# Altium PCB PCB2.PcbDoc (part 3 of 3)
Units mm, origin at the board's own origin, x right, y up, seen from the top; angles counter-clockwise.
Board outline 51.19 x 48.9 mm, 6 copper layers (Top Layer, Internal Plane 1, Signal Layer 3, Signal Layer 2, Internal Plane 2, Bottom Layer), stack 1.58 mm thick; 165 components, 90 nets, 480 pads, 1318 vias.
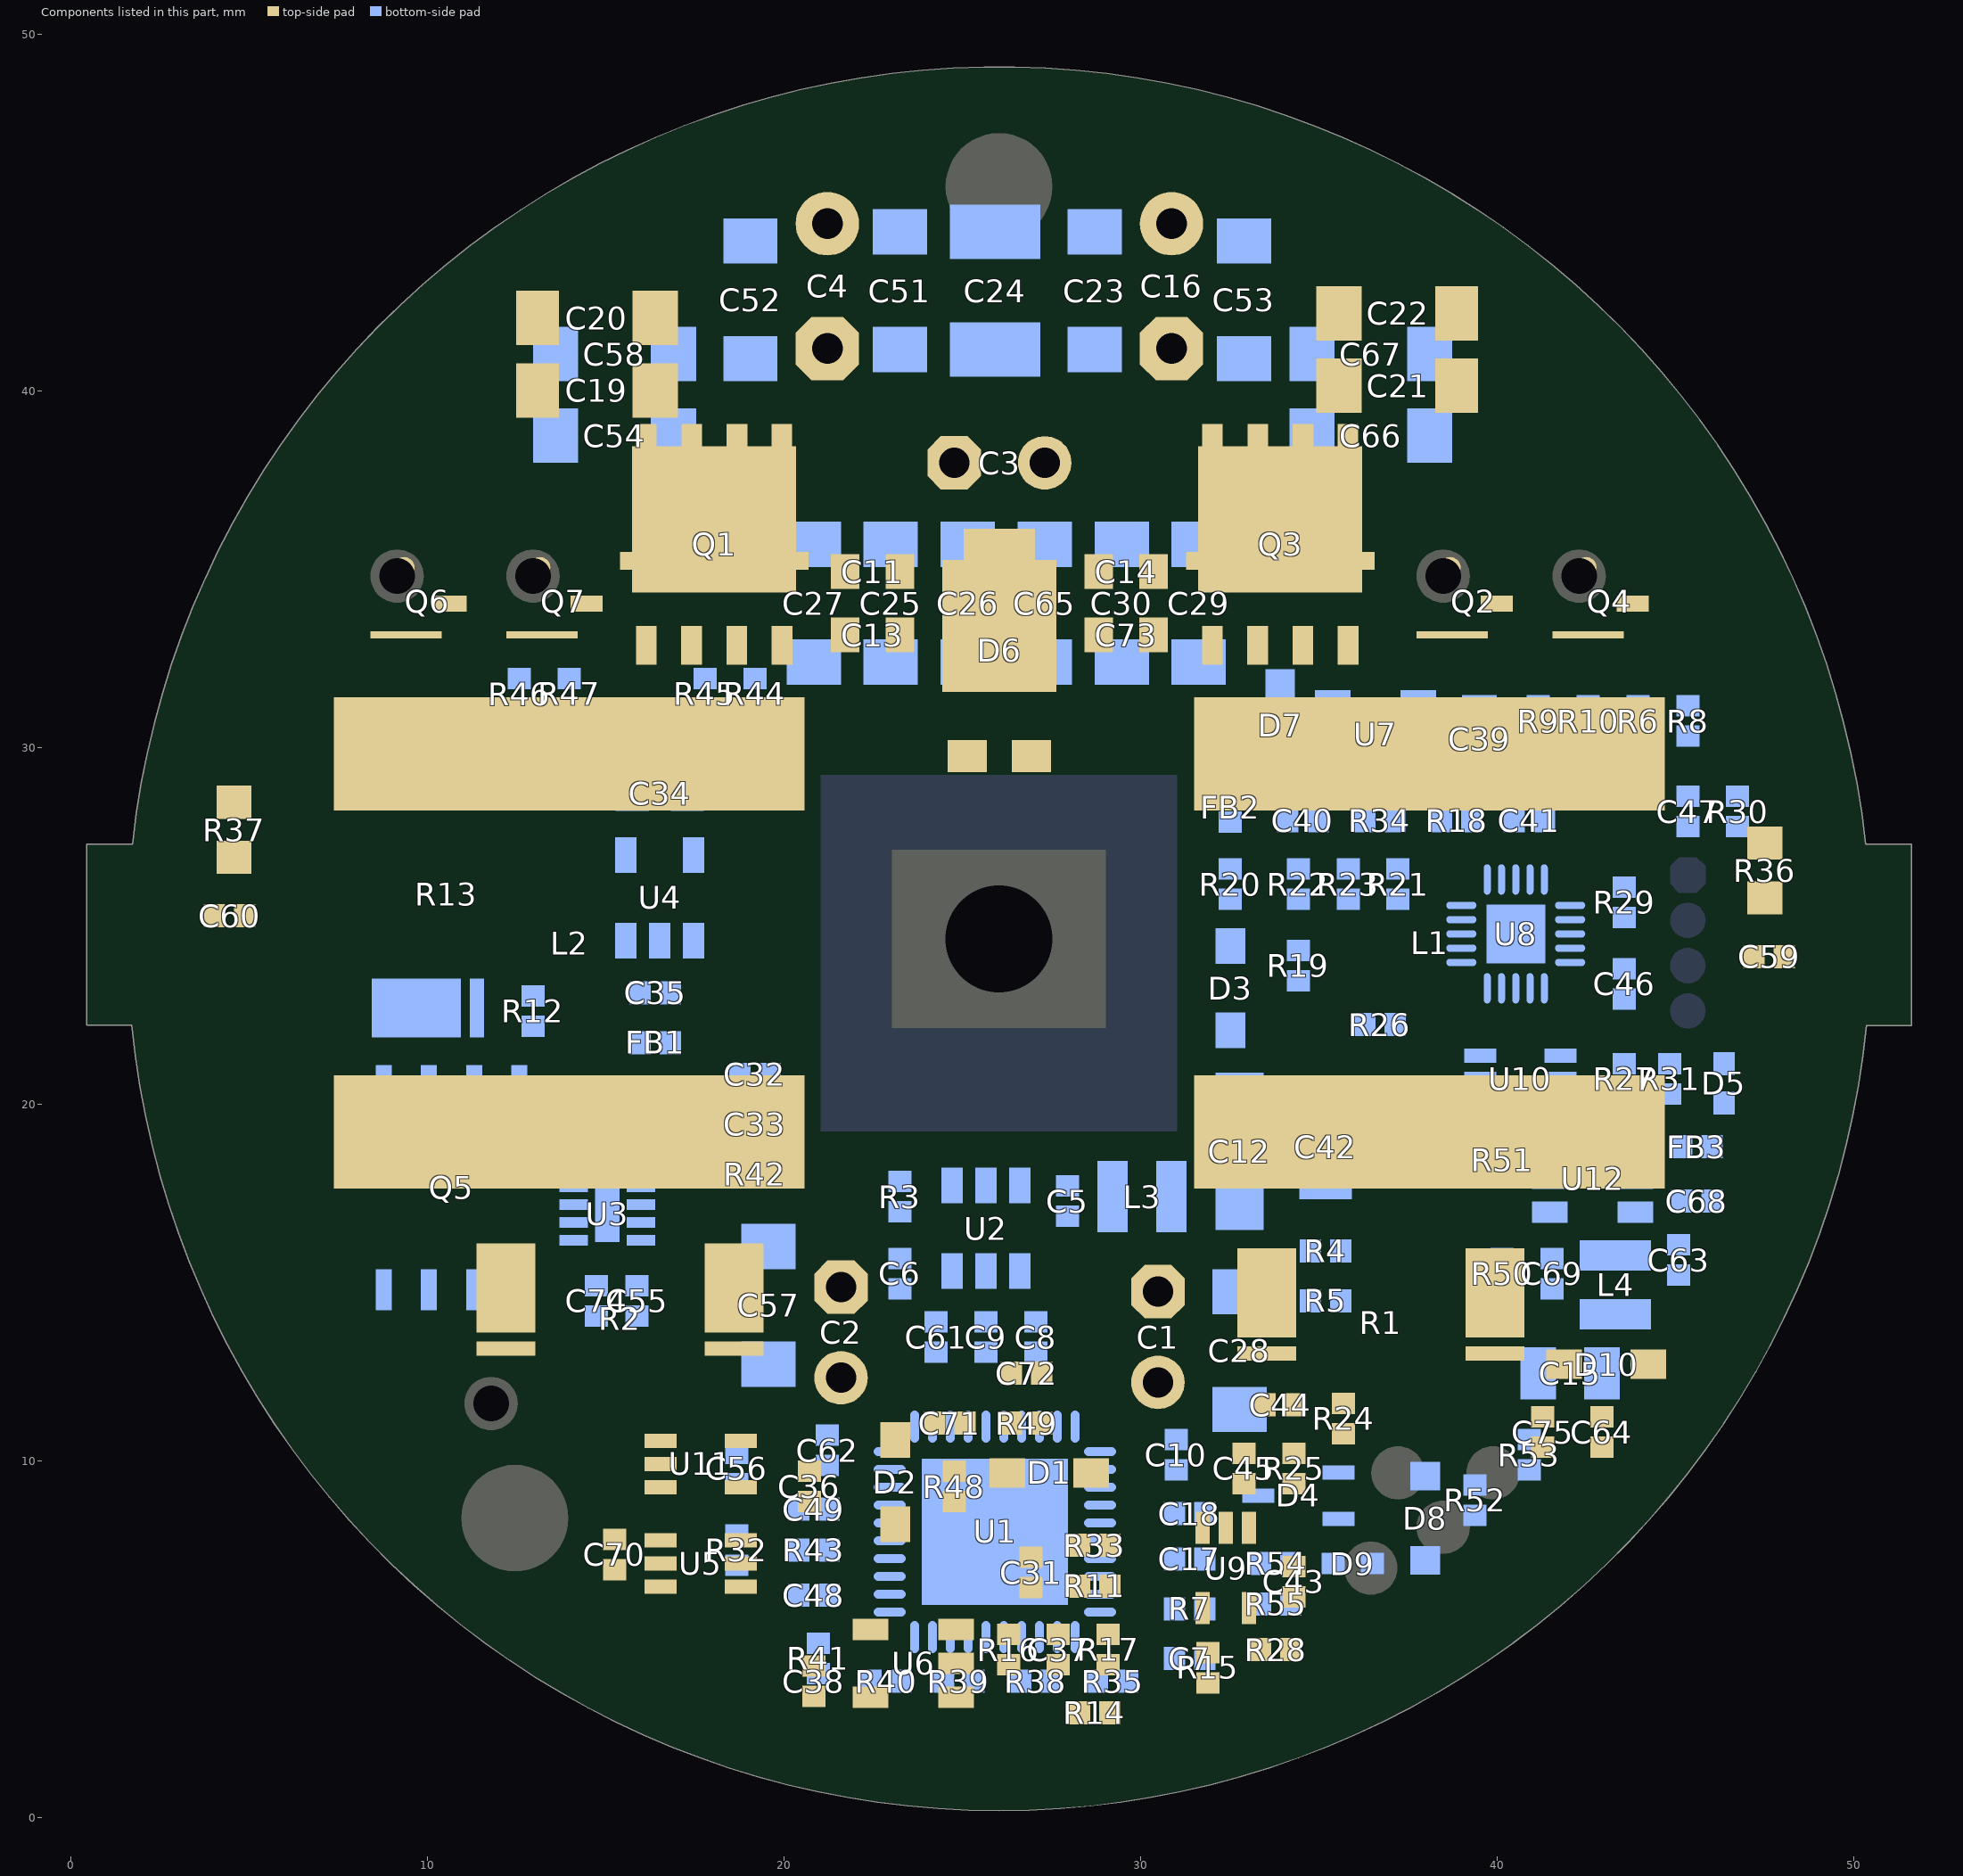
[diagram p7: the components of this part, seen from the top]

## Polygon pours and split planes (outlines as drawn) (continued)
DRVCC on Bottom Layer "Component Side-No Net 1" (solid, remove dead copper, pour order 236): 45.466,15.136 45.466,13.462 44.45,12.954 42.672,11.43 42.418,11.176 42.235,11.359 39.751,11.359 39.751,12.827 39.497,13.081 39.497,13.589 41.402,13.589 41.783,13.97 42.037,14.224 42.545,14.224
DRVCC on Bottom Layer "Component Side-No Net 1" (solid, remove dead copper, pour order 234): 45.974,15.875 45.212,16.637 38.354,16.637 38.354,12.048 38.596,11.807 39.077,11.326 39.584,11.326 44.808,11.326 44.831,11.303
GND on Bottom Layer "Component Side-No Net 1" (solid, remove dead copper, pour order 232): 25 vertices, not listed, extent 2.159,-3.175 56.007,32.385
DRVCC on Bottom Layer "Component Side-No Net 1" (solid, remove dead copper, pour order 226): 21 vertices, not listed, extent 39.751,11.684 45.466,15.621
TLX on Bottom Layer "Component Side-No Net 1" (solid, remove dead copper, pour order 220): 17 vertices, not listed, extent 41.148,14.478 44.577,17.457
GND on Bottom Layer "Component Side-No Net 1" (solid, remove dead copper, pour order 218): 42.164,18.288 39.624,18.288 39.624,16.256 40.64,16.256 40.767,16.383 40.767,17.399 42.164,17.399
DRVIN on Bottom Layer "Component Side-No Net 1" (solid, remove dead copper, pour order 216): 17 vertices, not listed, extent 43.307,16.815 46.355,19.304
VOUT on Bottom Layer "Component Side-No Net 1" (solid, remove dead copper, pour order 203): 10.668,36.068 10.922,36.322 37.719,36.322 37.719,42.672 37.338,43.053 36.576,43.815 11.557,43.815
GND on Bottom Layer "Component Side-No Net 1" (solid, remove dead copper, pour order 202): 20.447,36.83 27.305,36.83 27.432,36.703 27.432,35.306 20.447,35.306 20.193,35.052
GND on Bottom Layer "Component Side-No Net 1" (solid, remove dead copper, pour order 200): -3.683,30.099 -2.159,31.623 54.864,31.623 54.864,49.149 54.356,49.657 52.832,51.181 45.72,51.181 11.938,51.181 11.557,51.562
GND on Bottom Layer "Component Side-No Net 1" (solid, remove dead copper, pour order 154): 14.407,27.305 14.576,27.474 16.96,27.474 16.96,30.157 16.637,30.48 16.256,30.099 13.843,30.099
12V on Bottom Layer "Component Side-No Net 1" (solid, remove dead copper, pour order 187): 18.669,15.875 18.669,17.018 18.796,17.145 21.336,17.145 22.479,17.145 22.479,15.875 22.479,14.097 22.175,13.793 22.125,13.843 18.669,13.843
12V on Bottom Layer "Component Side-No Net 1" (solid, remove dead copper, pour order 185): 18.415,17.145 18.415,13.589 22.225,13.589 22.479,13.843 22.479,17.145
LED- on Bottom Layer "Component Side-No Net 1" (solid, remove dead copper, pour order 177): 21 vertices, not listed, extent 7.845,10.16 13.335,19.127
HPATH on Bottom Layer "Component Side-No Net 1" (solid, remove dead copper, pour order 171): 8.001,23.495 8.001,19.05 11.176,19.05 11.557,19.05 11.557,19.304 11.557,21.209 11.303,21.463 11.176,21.59 10.922,21.59 10.922,23.495
12V on Bottom Layer "Component Side-No Net 1" (solid, remove dead copper, pour order 166): 20.447,32.512 31.75,32.512 31.75,18.923 31.369,18.542 31.115,18.288 23.749,18.288 20.828,18.288 20.447,18.669
6V0 on Bottom Layer "Component Side-No Net 1" (solid, remove dead copper, pour order 146): 30.226,18.542 33.655,18.542 33.655,16.256 30.353,16.256 30.226,16.383
ALX on Bottom Layer "Component Side-No Net 1" (solid, remove dead copper, pour order 142): 26.162,18.415 29.718,18.415 29.718,16.383 28.829,16.383 28.321,16.383 28.321,17.145 27.686,17.145 26.162,17.145
12V on Bottom Layer "Component Side-No Net 1" (solid, remove dead copper, pour order 184): 20.447,32.184 20.447,33.147 31.877,33.147 31.877,31.115 31.623,30.861 30.734,29.972 30.734,28.023 26.372,28.023 26.035,27.686 25.4,28.321 20.447,28.321
GND on Bottom Layer "Component Side-No Net 1" (solid, remove dead copper, pour order 169): 18 vertices, not listed, extent 14.732,22.606 16.383,29.337
VOUT on Bottom Layer "Component Side-No Net 1" (solid, remove dead copper, pour order 192): 17 vertices, not listed, extent 30.48,37.338 36.195,42.164
VOUT on Bottom Layer "Component Side-No Net 1" (solid, remove dead copper, pour order 118): 18 vertices, not listed, extent 16.129,37.338 36.195,42.545
12V on Bottom Layer "Component Side-No Net 1" (solid, remove dead copper, pour order 174): 21.717,13.843 21.893,14.019 22.151,13.843 22.479,14.171 22.479,14.478 22.606,14.605 22.606,17.272 22.606,18.034 20.32,18.034 20.066,18.034 20.066,17.526 19.234,17.526 18.853,17.145 18.796,17.088 18.796,14.986
12V on Bottom Layer "Component Side-No Net 1" (solid, remove dead copper, pour order 176): 24.204,18.288 20.447,18.288 20.447,18.746 20.447,21.463 20.828,21.844 26.797,21.844
GND on Bottom Layer "Component Side-No Net 1" (solid, remove dead copper, pour order 113): 30.607,23.368 33.164,23.368 33.886,22.646 34.053,22.479 35.179,22.479 35.179,22.352 36.576,20.955 36.576,18.923 36.576,18.669 36.499,18.746 30.525,18.746
6V0 on Bottom Layer "Component Side-No Net 1" (solid, remove dead copper, pour order 123): 25.908,10.414 26.924,10.414 26.924,11.938 27.559,12.573 27.559,13.335 26.035,13.335 26.035,12.446 25.908,12.446
GND on Bottom Layer "Component Side-No Net 1" (solid, remove dead copper, pour order 126): 22.86,15.24 24.13,15.24 24.13,14.351 27.94,14.351 27.94,13.716 28.067,13.589 27.94,13.462 25.019,13.462 23.749,13.462 23.495,13.208 22.352,12.065 21.209,12.065 20.828,12.065 20.701,12.192 20.701,15.113
GND on Bottom Layer "Component Side-No Net 1" (solid, remove dead copper, pour order 127): 21.717,19.685 28.575,19.177 28.321,15.24 28.067,14.986 28.067,13.589 23.241,13.589
12V on Bottom Layer "Component Side-No Net 1" (solid, remove dead copper, pour order 130): 27.822,16.383 34.29,16.383 34.163,16.256 34.163,13.589 27.882,13.589 27.863,13.608
6V0 on Bottom Layer "Component Side-No Net 1" (solid, remove dead copper, pour order 132): 31.623,18.542 36.576,18.542 36.576,16.256 35.179,16.256 35.179,15.621 35.052,15.494 31.877,15.494
12V on Bottom Layer "Component Side-No Net 1" (solid, remove dead copper, pour order 135): 20.447,30.861 19.812,30.861 19.812,33.147 32.639,33.147 32.766,33.147 32.893,33.147 32.893,30.48 32.766,30.353 32.385,29.972 30.734,29.972
GND on Bottom Layer "Component Side-No Net 1" (solid, remove dead copper, pour order 144): 20.701,20.32 20.57,20.451 18.675,20.451 18.675,21.457 18.161,21.971 18.161,25.336 20.511,25.336 20.574,25.4
GND on Bottom Layer "Component Side-No Net 1" (solid, remove dead copper, pour order 145): 33.528,32.893 33.782,32.639 33.782,30.48 40.513,30.48 40.64,30.353 41.021,30.734 41.021,32.639
GND on Bottom Layer "Component Side-No Net 1" (solid, remove dead copper, pour order 149): 44.323,29.083 44.323,28.321 51.562,28.321 51.562,32.639 51.816,32.893 51.054,33.655 44.323,33.655
GND on Bottom Layer "Component Side-No Net 1" (solid, remove dead copper, pour order 151): 23 vertices, not listed, extent 18.415,8.255 33.909,14.224
6V0 on Bottom Layer "Component Side-No Net 1" (solid, remove dead copper, pour order 109): 14.351,14.351 16.637,14.351 16.637,16.256 16.383,16.51 15.494,16.51 15.494,17.272 17.399,17.272 17.399,17.399 17.399,13.716 17.399,13.589 17.272,13.462 14.351,13.462
6V0 on Bottom Layer "Component Side-No Net 1" (solid, remove dead copper, pour order 112): 15.494,14.351 16.383,14.351 16.383,17.272 17.399,17.272 17.399,13.589 15.494,13.589
MOSG on Bottom Layer "Component Side-No Net 1" (solid, remove dead copper, pour order 115): 13.716,17.526 16.383,17.526 16.383,18.415 16.002,18.796 13.716,18.796
MOSG on Bottom Layer "Component Side-No Net 1" (solid, remove dead copper, pour order 117): 14.493,17.526 13.716,17.526 13.589,17.653 13.589,18.923 13.589,19.05 13.335,19.304 12.827,19.812 12.319,19.812 12.319,21.209 13.081,21.209 13.716,21.209 14.732,20.193 16.383,18.542 16.383,17.526
GND on Bottom Layer "Component Side-No Net 1" (solid, remove dead copper, pour order 120): 12.59,10.016 12.59,9.762 14.351,8.001 14.605,7.747 19.177,7.747 19.177,17.018 18.669,17.526 17.653,18.542 11.176,18.542
GND on Bottom Layer "Component Side-No Net 1" (solid, remove dead copper, pour order 122): -6.477,39.37 10.287,39.37 13.97,35.687 13.716,35.433 13.716,18.796 4.445,6.731 -3.302,17.399
GND on Bottom Layer "Component Side-No Net 1" (solid, remove dead copper, pour order 125): -5.969,36.068 -3.937,34.036 21.844,34.036 21.844,17.399 20.701,16.256 17.526,13.081 -12.446,13.081
GND on Bottom Layer "Component Side-No Net 1" (solid, remove dead copper, pour order 129): 32.004,33.147 32.004,30.861 31.496,30.353 31.885,29.964 31.885,26.739 32.689,26.739 33.037,27.087 33.365,27.415 33.619,27.415 35.035,27.415 36.322,28.702 37.846,28.702 37.846,33.294 38.354,33.802
GND on Bottom Layer "Component Side-No Net 1" (solid, remove dead copper, pour order 131): 30.988,9.735 32.302,9.735 35.111,9.735 35.179,9.667 36.576,11.064 36.576,16.51 30.988,16.51 30.607,16.129
12V on Bottom Layer "Component Side-No Net 1" (solid, remove dead copper, pour order 134): 28.956,28.702 29.591,29.337 31.369,29.337 31.496,29.21 32.512,29.21 32.512,29.251 33.294,30.033 32.893,30.48 32.639,32.512 31.763,32.245 31.496,32.512
GND on Bottom Layer "Component Side-No Net 1" (solid, remove dead copper, pour order 137): -3.937,34.29 -1.651,36.576 13.716,36.576 13.716,25.019 11.379,22.682 10.795,22.098 10.795,16.256 -5.334,16.256 -5.969,15.621
6V0 on Bottom Layer "Component Side-No Net 1" (solid, remove dead copper, pour order 140): 17.145,16.764 17.145,17.145 17.399,17.399 17.272,17.526 15.113,17.526 15.113,16.383 14.986,16.256 15.113,16.129 17.526,16.129
GND on Signal Layer 2 "Component Side-No Net 1" (solid, remove dead copper, pour order 242): -4.572,53.594 -2.54,51.562 -2.54,10.033 1.016,10.033 11.938,-0.889 12.7,-1.651 40.386,-1.651 43.815,-1.651 56.896,11.43 58.039,12.573 58.039,50.165
LED- on Signal Layer 2 "Component Side-No Net 1" (solid, remove dead copper, pour order 148): 9.017,13.335 9.017,12.573 9.017,12.065 10.414,10.668 10.922,10.16 12.446,10.16 12.7,10.16 13.081,10.541 13.081,12.7 11.303,12.7 10.668,13.335
12V on Signal Layer 2 "Component Side-No Net 1" (solid, remove dead copper, pour order 167): 22.572,20.159 22.479,20.251 22.479,30.226 29.591,30.226 29.591,20.066
VOUT on Signal Layer 2 "Component Side-No Net 1" (solid, remove dead copper, pour order 193): 19 vertices, not listed, extent 28.956,37.338 36.068,42.672
VOUT on Signal Layer 2 "Component Side-No Net 1" (solid, remove dead copper, pour order 195): 19.177,42.545 19.177,42.418 18.288,41.529 16.637,41.529 16.383,41.529 16.129,41.275 16.002,41.148 16.002,37.592 16.002,37.084 16.129,36.957 16.256,36.83 20.447,36.83
VOUT on Signal Layer 2 "Component Side-No Net 1" (solid, remove dead copper, pour order 136): 23 vertices, not listed, extent 15.621,35.687 31.496,43.688
GND on Signal Layer 2 "Component Side-No Net 1" (solid, remove dead copper, pour order 141): 17.907,40.132 18.669,39.37 34.036,39.37 34.036,34.417 33.147,33.528 20.828,33.528
12V on Signal Layer 2 "Component Side-No Net 1" (solid, remove dead copper, pour order 168): 29.718,15.621 33.655,15.621 33.909,15.367 33.909,13.462 30.226,13.462 29.718,13.97
12V on Signal Layer 2 "Component Side-No Net 1" (solid, remove dead copper, pour order 190): 17 vertices, not listed, extent 18.034,13.589 33.909,21.971
VOUT on Top Layer "Component Side-No Net 1" (solid, remove dead copper, pour order 252): 24.003,36.46 28.183,36.46 28.321,36.322 28.448,36.195 28.448,31.242 28.448,31.369 28.194,31.623 28.067,31.496 27.051,31.496 23.622,31.496
GND on Top Layer "Component Side-No Net 1" (solid, remove dead copper, pour order 240): 57.658,23.241 39.878,23.241 38.735,22.098 38.735,18.415 1.143,18.415 0.635,17.907 1.778,16.764 1.778,10.541 1.778,9.906 7.239,4.445 12.065,-0.381 40.132,-0.381 47.498,6.985
DRVCC on Top Layer "Component Side-No Net 1" (solid, remove dead copper, pour order 238): 43.307,10.922 40.894,10.922 40.894,11.684 40.894,11.938 41.275,12.319 41.275,13.081 41.275,13.208 43.307,13.208
NetL1_1 on Top Layer "Component Side-No Net 1" (solid, remove dead copper, pour order 230): 44.958,20.828 44.958,16.764 44.958,14.478 43.942,13.462 38.354,13.462 32.258,13.462 30.099,15.621 30.099,21.082 44.959,21.082
6V0 on Top Layer "Component Side-No Net 1" (solid, remove dead copper, pour order 209): 24.34,11.049 24.467,11.176 27.722,11.176 27.722,13.426 27.432,13.716 27.305,13.589 23.495,13.589
GND on Top Layer "Component Side-No Net 1" (solid, remove dead copper, pour order 206): 22.987,39.116 31.496,39.116 31.623,39.243 32.385,38.481 32.385,35.179 24.257,35.179 24.13,35.306
12V on Top Layer "Component Side-No Net 1" (solid, remove dead copper, pour order 205): 21.844,28.956 21.844,35.687 22.098,35.941 22.352,35.687 29.591,35.687 29.591,29.464 29.845,29.21
GND on Top Layer "Component Side-No Net 1" (solid, remove dead copper, pour order 204): 18 vertices, not listed, extent 25.273,30.099 31.295,39.243
GND on Top Layer "Component Side-No Net 1" (solid, remove dead copper, pour order 201): 24.003,36.83 24.003,35.56 22.352,35.56 22.225,35.433 22.225,30.226 21.971,30.226 20.193,30.226 20.193,36.703 20.066,36.83
NetC59_1 on Top Layer "Component Side-No Net 1" (solid, remove dead copper, pour order 199): 46.609,26.289 48.26,26.289 48.26,24.892 48.26,24.765 48.133,24.638 47.625,24.638 47.625,23.749 46.609,23.749
LX1 on Top Layer "Component Side-No Net 1" (solid, remove dead copper, pour order 198): 48.006,26.797 44.958,26.797 44.45,27.305 44.323,27.432 44.323,27.813 44.323,27.94 43.815,28.448 43.815,29.21 44.45,29.21 45.847,27.813 48.006,27.813
LX2 on Top Layer "Component Side-No Net 1" (solid, remove dead copper, pour order 197): 19 vertices, not listed, extent 3.839,27.636 21.717,33.528
LX1 on Top Layer "Component Side-No Net 1" (solid, remove dead copper, pour order 196): 30.988,28.067 44.704,28.067 44.704,32.512 43.942,33.274 39.878,33.274 37.338,33.274 37.084,33.528 30.988,33.528
NetL2_1 on Top Layer "Component Side-No Net 1" (solid, remove dead copper, pour order 173): 6.754,18.643 6.754,14.364 7.747,13.589 8.573,13.589 12.7,13.589 12.7,19.812 12.446,20.066
GND on Top Layer "Component Side-No Net 1" (solid, remove dead copper, pour order 170): 32.385,22.733 33.401,22.733 33.401,21.146 33.314,21.059 32.702,20.447 32.385,20.447
NetL2_1 on Top Layer "Component Side-No Net 1" (solid, remove dead copper, pour order 143): 11.172,13.589 7.366,13.589 7.366,18.796 7.493,18.669 12.319,18.669 12.319,13.589
GND on Top Layer "Component Side-No Net 1" (solid, remove dead copper, pour order 138): 2.286,17.526 6.35,17.526 7.112,16.764 7.112,9.017 4.953,9.017 4.826,8.89
12V on Top Layer "Component Side-No Net 1" (solid, remove dead copper, pour order 165): 21.082,28.321 21.082,30.226 28.194,30.226 30.861,30.226 30.988,30.099 30.988,27.432 30.988,25.273 30.861,25.146 30.607,24.892 21.082,24.892
GND on Top Layer "Component Side-No Net 1" (solid, remove dead copper, pour order 157): 9.144,24.13 9.779,24.13 10.16,24.511 10.16,26.543 10.16,27.686 8.636,27.686 8.636,24.13 8.89,23.876
LED- on Top Layer "Component Side-No Net 1" (solid, remove dead copper, pour order 147): 17 vertices, not listed, extent 8.89,9.906 14.478,13.335
12V on Top Layer "Component Side-No Net 1" (solid, remove dead copper, pour order 152): 24 vertices, not listed, extent 17.78,13.462 34.29,28.829
NetL2_1 on Top Layer "Component Side-No Net 1" (solid, remove dead copper, pour order 121): 6.858,21.209 6.985,21.082 21.082,21.082 21.082,17.653 20.701,17.272 18.034,17.272 17.78,17.018 17.78,13.532 17.723,13.589 10.287,13.589 6.604,13.589 6.477,13.716
GND on Top Layer "Component Side-No Net 1" (solid, remove dead copper, pour order 108): 13.97,17.272 14.224,17.018 16.51,17.018 16.51,16.383 16.129,16.002 13.589,16.002
VOUT on Top Layer "Component Side-No Net 1" (solid, remove dead copper, pour order 111): 23.749,43.688 24.003,43.942 24.003,46.482 24.003,47.244 24.13,47.371 27.305,47.371 27.813,47.371 28.194,46.99 28.194,44.323 28.194,43.942 28.702,43.434 28.702,41.91 24.003,41.91 23.876,42.037
NetC60_1 on Top Layer "Component Side-No Net 1" (solid, remove dead copper, pour order 139): 4.064,27.432 5.334,27.432 5.334,25.908 5.207,25.781 4.572,25.781 4.445,25.654 4.445,24.892 3.683,24.892 3.683,26.162 3.683,27.305 3.81,27.432
GND on Top Layer "Component Side-No Net 1" (solid, remove dead copper, pour order 150): -1.524,28.067 9.779,28.067 10.414,28.702 10.287,28.575 10.287,24.257 10.287,16.383 10.033,16.129 7.62,13.716 -3.302,13.716
GND on Top Layer "Component Side-No Net 1" (solid, remove dead copper, pour order 156): 0.127,15.748 7.747,15.748 7.874,15.621 8.255,15.24 8.255,11.938 0.127,11.938 -0.381,11.43
GND on Top Layer "Component Side-No Net 1" (solid, remove dead copper, pour order 161): 15.24,27.94 16.256,27.94 16.256,26.543 15.875,26.162 15.875,25.273 14.859,25.273 14.859,26.162 15.24,26.543
LED- on Top Layer "Component Side-No Net 1" (solid, remove dead copper, pour order 179): 21 vertices, not listed, extent 8.89,6.604 14.605,13.335
GND on Top Layer "Component Side-No Net 1" (solid, remove dead copper, pour order 107): 19.558,13.462 19.558,11.176 20.193,10.541 20.828,11.176 31.623,11.176 31.623,14.224 31.877,14.478
GND on Top Layer "Component Side-No Net 1" (solid, remove dead copper, pour order 194): 26.797,13.462 26.797,13.081 26.797,11.43 27.406,11.43 27.722,11.114 27.805,11.196 30.353,11.196 30.353,13.716 30.226,13.843 26.492,13.843
GND on Top Layer "Component Side-No Net 1" (solid, remove dead copper, pour order 114): 55.626,33.401 54.737,32.512 45.339,32.512 45.339,25.583 45.776,25.146 46.101,24.821 46.101,22.733 53.213,22.733 53.848,22.098
VOUT on Top Layer "Component Side-No Net 1" (solid, remove dead copper, pour order 110): 16.891,34.29 15.24,34.29 15.24,35.814 15.24,42.652 16.022,43.434 16.891,43.434
VOUT on Top Layer "Component Side-No Net 1" (solid, remove dead copper, pour order 116): 14.605,34.29 36.963,34.29 37.034,34.219 37.719,34.904 37.719,43.18 37.719,44.196 37.211,44.704 36.576,44.069 14.859,44.069
GH2 on Top Layer "Component Side-No Net 1" (solid, remove dead copper, pour order 119): 19.449,33.528 20.955,33.528 21.082,33.401 21.082,32.044 19.471,32.044 19.304,31.877 18.923,32.258 18.923,33.528
LX2 on Top Layer "Component Side-No Net 1" (solid, remove dead copper, pour order 124): 7.005,33.401 16.383,33.401 17.018,32.766 17.145,32.639 17.145,30.607 8.255,30.607 8.001,30.861
GND on Top Layer "Component Side-No Net 1" (solid, remove dead copper, pour order 128): 25 vertices, not listed, extent -2.032,24.384 51.943,50.8
GND on Top Layer "Component Side-No Net 1" (solid, remove dead copper, pour order 133): 38.227,28.321 38.354,28.194 38.354,19.177 53.086,19.177 55.753,21.844 55.88,21.971 55.88,31.242 37.973,31.242 37.211,30.48
GND on Signal Layer 3 "Component Side-No Net 1" (solid, remove dead copper, pour order 248): -0.635,10.033 25.019,10.033 29.464,5.588 29.083,5.207 29.083,-0.381 14.605,-0.381 14.478,-0.254
GND on Signal Layer 3 "Component Side-No Net 1" (solid, remove dead copper, pour order 246): 18.161,31.115 7.747,31.115 7.62,31.242 6.731,32.131 1.27,32.131 1.27,30.988 0.127,29.845 0.254,29.718 0.254,19.812 0.254,13.462 4.445,9.271 6.858,6.858 6.858,6.096
GND on Signal Layer 3 "Component Side-No Net 1" (solid, remove dead copper, pour order 244): 27 vertices, not listed, extent 19.812,-2.54 53.34,29.464
12V on Signal Layer 3 "Component Side-No Net 1" (solid, remove dead copper, pour order 228): 29.083,13.843 33.909,13.843 33.909,15.494 33.02,16.383 30.353,16.383 29.067,15.097
12V on Signal Layer 3 "Component Side-No Net 1" (solid, remove dead copper, pour order 208): 18.161,18.288 22.987,18.288 23.114,18.161 23.549,17.726 23.549,13.358 18.565,13.358 18.288,13.081
GND on Signal Layer 3 "Component Side-No Net 1" (solid, remove dead copper, pour order 207): 17.399,20.32 17.653,20.574 21.336,20.574 23.368,20.574 25.908,18.034 25.958,17.984 25.958,11.811 23.114,11.811 22.86,12.065 22.606,12.319 20.32,12.319
VOUT on Signal Layer 3 "Component Side-No Net 1" (solid, remove dead copper, pour order 180): 25 vertices, not listed, extent 15.875,36.83 36.068,42.037
LED- on Signal Layer 3 "Component Side-No Net 1" (solid, remove dead copper, pour order 183): 9.017,13.335 12.7,13.335 13.081,12.954 13.208,12.827 13.208,10.668 12.573,10.033 11.176,10.033 10.922,10.033 9.779,11.176 9.017,11.938 9.017,12.573
VOUT on Signal Layer 3 "Component Side-No Net 1" (solid, remove dead copper, pour order 153): 17 vertices, not listed, extent 15.875,37.465 36.068,42.799
GND on Signal Layer 3 "Component Side-No Net 1" (solid, remove dead copper, pour order 163): 32.131,34.798 31.877,35.052 24.257,35.052 24.257,40.259 23.749,40.767 24.765,39.751 31.115,39.751
GND on Signal Layer 3 "Component Side-No Net 1" (solid, remove dead copper, pour order 181): 37 vertices, not listed, extent -3.429,28.702 53.086,54.864
GND on Signal Layer 3 "Component Side-No Net 1" (solid, remove dead copper, pour order 186): 48 vertices, not listed, extent 7.874,5.842 43.815,37.338
GND on Signal Layer 3 "Component Side-No Net 1" (solid, remove dead copper, pour order 188): 21 vertices, not listed, extent 5.461,5.197 23.495,31.115
GND on Signal Layer 3 "Component Side-No Net 1" (solid, remove dead copper, pour order 189): 24.003,10.795 23.876,10.922 21.336,10.922 21.336,5.825 21.308,5.797 21.39,5.715 24.765,5.715
VOUT on Internal Plane 1 (split plane): 33 vertices, not listed, extent 15.877,37.086 36.195,43.051
12V on Internal Plane 1 (split plane): 32 vertices, not listed, extent 20.576,13.697 34.161,30.605
LED- on Internal Plane 1 (split plane): 17 vertices, not listed, extent 8.892,10.035 13.206,13.333
GND on Internal Plane 1 (split plane): 293 vertices, not listed, extent 0.943,0.686 51.108,48.57
12V on Internal Plane 2 (split plane): 33 vertices, not listed, extent 20.068,13.591 34.288,30.732
GND on Internal Plane 2 (split plane): 22.733,12.967 22.731,12.954 22.731,9.779 21.211,9.779 21.202,9.829 21.174,9.871 19.468,11.576 20.997,13.106 22.733,13.106
GND on Internal Plane 2 (split plane): 19.429,25.346 19.429,22.152 19.377,22.1 18.723,22.1 18.671,22.152 18.671,25.346 18.723,25.398 19.377,25.398
INTVCC on Internal Plane 2 (split plane): 38 vertices, not listed, extent 24.13,2.669 28.7,13.28
5VFB on Internal Plane 2 (split plane): 21 vertices, not listed, extent 18.036,3.177 22.35,11.809
VOUT on Internal Plane 2 (split plane): 24 vertices, not listed, extent 15.496,36.832 36.193,42.67
6V0 on Internal Plane 2 (split plane): 77 vertices, not listed, extent 15.75,10.67 35.812,33.018
GND on Internal Plane 2 (split plane): 293 vertices, not listed, extent 0.943,0.686 51.108,48.57
LED- on Internal Plane 2 (split plane): 13.206,12.646 13.206,10.722 12.392,9.908 11.159,9.908 8.892,12.175 8.892,13.333 12.519,13.333

## Keep-outs
Keep-Out Layer:
  lines w0.254: 1.067,22.209 1.07,22.206 ; 50.983,22.202 50.981,22.2 ; 1.07,22.206 0.435,22.206 0.432,22.204 0.432,27.284 1.72,27.284 cw(c26.025,24.628) 50.331,27.277 51.618,27.277 51.618,22.197 51.616,22.2 50.981,22.2 ; 1.07,22.206 1.696,22.206 ccw(c26.025,24.628) 50.354,22.2 50.981,22.2

## Other copper
Top Layer:
  rectangle net GND: 43.815,11.43 44.577,12.827
  rectangle net GND: 41.021,9.144 41.529,10.668
  rectangle net GND: 42.672,9.525 43.18,10.541
  rectangle net GND: 43.815,12.319 46.355,13.081
  rectangle net GND: 39.751,16.383 40.767,17.399
  rectangle net VOUT: 24.511,34.671 27.686,36.195
  rectangle net GND: 39.624,24.003 40.767,25.146
  rectangle net GND: 43.18,24.003 44.323,24.837
  rectangle net 6V0: 34.544,16.383 35.56,17.399
  rectangle net GND: 18.796,22.098 19.304,25.273
Signal Layer 3:
  rectangle net GND: 19.304,43.307 32.893,46.101
  rectangle net GND: 23.876,6.223 26.797,9.017
  rectangle net 12V: 22.479,19.939 29.591,30.226
  rectangle net 6V0: 26.162,11.557 26.67,13.208
Signal Layer 2:
  rectangle net GND: 19.304,43.18 32.766,45.847
  rectangle net 6V0: 26.162,11.644 26.693,13.231
  text "厉不厉害你坤哥" at 14.478,7.366 h1.27 r90
Bottom Layer:
  rectangle net GND: 44.831,15.748 45.974,16.256
  rectangle net GND: 45.847,16.383 46.228,17.526
  rectangle net GND: 45.847,17.018 46.99,17.526
  rectangle net GND: 40.894,17.526 42.545,18.288
  rectangle net GND: 42.545,10.668 43.307,13.081
  rectangle net GND: 42.926,11.811 45.339,13.081
Internal Plane 1 (plane layer: these items are gaps in the copper):
  rectangle: 24.003,15.24 25.4,18.415
  lines w0.254: 30.226,28.194 30.226,30.226 29.718,30.734 22.098,30.734 21.717,30.353 21.717,30.099 21.717,18.669 20.447,18.669 20.447,13.751 27.813,13.751 27.997,13.567 34.026,13.567 ; 30.226,28.702 30.226,19.685 30.226,18.669 30.734,18.161 33.782,18.161 34.29,17.653 34.29,15.367 ; 34.014,13.567 34.29,13.843 34.29,15.621 ; 8.763,12.192 8.763,13.208 9.017,13.462 10.541,13.462 11.43,12.573 12.192,12.573 12.573,12.954 13.081,12.954 13.335,12.7 13.335,10.668 12.573,9.906 11.049,9.906 8.763,12.192 ; 15.748,37.338 16.129,36.957 24.13,36.957 25.781,36.957 25.908,37.084 25.908,37.973 26.924,38.989 27.559,38.989 28.067,38.481 31.623,38.481 31.75,38.354 31.75,37.282 31.948,37.084 36.124,37.084 36.324,37.284 36.324,39.368 32.512,43.18 30.48,43.18 19.883,43.18 18.648,41.945 17.18,41.945 15.748,40.513 15.748,37.338
Internal Plane 2 (plane layer: these items are gaps in the copper):
  rectangle: 22.733,9.144 24.13,13.208
  rectangle: 21.082,8.763 22.479,9.779
  rectangle: 21.336,9.144 23.241,9.779
  lines w0.2: 19.304,11.557 20.955,13.208 21.209,13.208 24.257,13.208 24.431,13.382 25.961,13.382 25.961,10.541
  lines w0.254: 18.415,11.938 17.907,11.43 ; 18.469,11.938 18.923,11.938 21.082,9.779 21.082,8.763 21.844,8.763 22.479,8.763 ; 22.86,9.144 22.86,12.954 ; 24.892,14.605 27.837,14.605 28.827,13.616 28.827,10.187 ; 25.146,14.605 22.55,14.605 22.042,14.097 21.082,14.097 19.939,15.24 19.939,17.018 20.193,17.272 20.193,19.685 20.828,20.32 20.828,30.861 30.48,30.861 31.496,29.845 31.496,17.907 34.417,14.986 ; 25.961,10.541 28.827,10.541 ; 28.829,10.331 28.829,5.334 27.305,3.81 27.305,2.54 25.273,2.54 25.273,3.81 27.051,5.588 27.051,7.803 27.432,8.184 27.432,8.763 27.051,9.144 22.479,9.144 22.479,5.08 20.447,3.048 19.558,3.048 19.304,3.302 19.304,4.445 19.304,9.398 17.907,10.795 17.907,11.43 ; 28.853,13.589 30.48,13.589 30.607,13.462 33.655,13.462 34.417,14.224 ; 34.417,14.478 34.417,14.224 ; 17.907,11.43 16.637,11.43 15.621,12.446 15.621,14.605 15.748,14.732 15.748,23.749 17.399,25.4 17.399,31.242 19.304,33.147 33.02,33.147 35.433,30.734 35.433,26.416 35.941,25.908 35.941,16.51 34.417,14.986 ; 34.417,14.224 34.417,14.986 ; 8.763,12.121 11.105,9.779 12.446,9.779 13.335,10.668 13.335,12.7 12.573,13.462 8.763,13.462 8.763,12.121 ; 15.367,36.703 25.654,36.703 26.035,37.084 26.035,38.227 26.67,38.862 28.067,38.862 29.591,37.338 31.75,37.338 32.258,36.83 35.687,36.83 36.322,37.465 36.322,40.767 34.29,42.799 17.907,42.799 15.367,40.259 15.367,36.703 ; 18.542,22.098 18.542,25.4 18.669,25.527 19.431,25.527 19.558,25.4 19.558,22.098 19.431,21.971 18.669,21.971 18.542,22.098

## Silkscreen, mask and mechanical layers (free items; w line width, h text height)
Top Overlay:
  circle w0.254: c26.025,24.628 r23
  rectangle: 23.322,2.818 23.922,3.175
  rectangle: 24.035,30.311 28.035,31.369
  rectangle: 24.003,15.24 28.067,20.066
  rectangle: 14.224,16.383 15.494,16.911
  rectangle: 34.417,16.383 35.56,17.399
  rectangle: 15.433,33.528 20.632,34.163
  rectangle: 31.377,33.528 36.576,34.163
  lines w0.254: 6.096,27.178 6.604,27.686 ; 6.604,21.463 6.604,27.686 ; 7.112,27.178 6.604,27.686 ; 9.59,14.097 9.59,10.589 15.875,10.589 ; 13.208,6.35 13.208,6.858 ; 13.716,6.858 13.208,6.858 ; 15.113,5.08 14.986,5.08 13.208,6.858 ; 15.24,5.08 15.621,5.08 ; 19.558,10.541 21.59,10.541 ; 29.083,37.211 29.083,37.973 ; 43.815,26.797 44.323,27.305 ; 44.323,21.59 44.323,27.305 ; 44.831,26.797 44.323,27.305
  text "LED+" at 26.416,41.275 h1.27 r90
  text "屯" at 21.209,36.703 h1.78
  text "屯" at 29.464,36.703 h1.78
  text "烫" at 5.715,33.02 h1.78
  text "烫" at 44.958,33.02 h1.78
  text "JLCJLCJLCJLC" at 7.493,26.162 h2
  text "抄板子没鸡鸡哦" at 31.877,25.908 h1.78
  text "XAL1580-102" at 32.512,23.749 h2
  text "XAL1580-102" at 7.874,23.622 h2
  text "装不回去了吧！" at 32.512,21.717 h2
  text "看到我就已经废了" at 6.985,21.463 h2
  text "RC2" at 5.08,21.082 h2 r90
  text "RC1" at 48.006,19.685 h2 r90
  text "PH1" at 44.704,16.637 h2 r270
  text "PH2" at 6.35,16.51 h2 r270
  text ".75mR" at 13.462,13.97 h1.52
  text ".75mR" at 34.671,13.97 h1.52
  text "GaN" at 22.606,12.065 h1.78
  text "KEY" at 37.084,10.668 h2
  text "-" at 20.32,10.414 h3.3
  text "2PH" at 29.083,10.414 h1.78 r90
  text "-" at 30.988,10.414 h3.3
  text "R" at 36.195,8.89 h1.6 r90
  text "K" at 40.132,7.747 h1.6
  text "FLBM3" at 20.32,6.223 h2
  text "Gr" at 37.846,6.223 h1.6
  text "G" at 36.068,4.953 h1.6
  text "LED-" at 16.129,4.318 h2
  text "PCB By:Red35" at 30.988,2.413 h1.78 r90
Bottom Overlay:
  drawing of 42 lines, arcs and shapes, not listed
  text "+" at 30.353,39.243 h1.8 r270
  text "+" at 20.701,39.116 h1.8 r270
  text "+" at 22.733,37.592 h1.8 r270
  text "烫烫" at 21.59,37.084 h2
  text "屯屯" at 33.02,37.084 h2
  text "坤" at 45.212,33.655 h1.4
  text "坤" at 7.874,33.528 h1.4
  text "For:" at 7.493,32.512 h2 r90
  text "唱跳RAP篮球MUSIC" at 46.101,32.131 h1.4
  text "2026" at 11.303,31.623 h1.4
  text "Xtern Ripper Lite" at 6.096,30.734 h2.2 r90
  text "07/04" at 11.43,30.48 h1.4
  text "哎哟" at 15.494,30.353 h1.4 r270
  text "T" at 47.117,30.353 h1.7 r90
  text "Redstoner_35" at 30.48,29.718 h2.2
  text "DFEx-FloodBeaMon3tr" at 7.62,29.083 h2 r90
  text "6L" at 43.434,27.432 h1.78 r270
  text "2Oz" at 42.291,26.924 h1.78 r270
  text "G" at 46.228,25.908 h1.52 r270
  text "V" at 46.228,24.638 h1.52 r270
  text "R001" at 9.271,24.511 h1.52 r270
  text "1.2KW" at 12.446,24.511 h1.52 r270
  text "24V LED" at 13.716,24.003 h1.52 r270
  text "ULQ" at 38.1,23.495 h2
  text "D" at 46.228,23.495 h1.52 r270
  text "C" at 46.228,22.225 h1.52 r270
  text "HyperBoost" at 19.812,22.098 h1.78 r270
  text "GaN HV 4S" at 18.288,21.971 h1.78 r270
  text "LV GaN HEMT" at 38.735,20.828 h1.4 r90
  text "HFS" at 17.399,19.05 h2
  text "B+" at 22.098,17.653 h1.4
  text "+" at 21.082,16.002 h1.8 r270
  text "+" at 28.448,14.351 h1.8 r270
  text "16Hz" at 16.891,13.843 h1.78 r270
  text "-" at 23.114,11.938 h1.8
  text "-" at 29.21,11.811 h1.8
  text "V1.1" at 12.827,9.144 h2
  text "的电池！" at 13.589,7.366 h1.52 r270
  text "能至少100A" at 15.113,5.969 h1.52 r270
  text "E" at 35.052,5.461 h1.78 r270
  text "请使用放电性" at 16.637,4.953 h1.52 r270
  text "35" at 18.288,4.572 h1.78 r270
Top Solder:
  circle w1.5: c26.025,24.628 r23.95
  region: 28.003,29.083 24.003,29.083 24.003,28.083 28.003,28.083
  region: 29.464,28.131 29.464,32.131 28.464,32.131 28.464,28.131
  region: 23.622,28.067 23.622,32.067 22.622,32.067 22.622,28.067
  rectangle: 8.351,36.862 14.351,38.862
  rectangle: 37.719,36.862 43.719,38.862
  rectangle: 23.622,20.066 28.829,22.86
  rectangle: 19.05,14.732 23.495,16.129
  rectangle: 20.066,15.875 23.241,16.637
  rectangle: 28.321,14.859 32.893,16.002
  rectangle: 28.702,15.748 32.131,16.51
  rectangle: 19.05,13.843 24.257,14.732
  rectangle: 19.304,13.716 33.147,14.478
  rectangle: 15.875,37.973 17.78,40.894
  rectangle: 34.29,37.592 36.195,40.894
  rectangle: 0.432,22.098 2.159,27.284
  rectangle: 49.53,22.225 51.618,27.278
  rectangle: 22.606,13.843 29.337,14.732
  lines w1: 18.669,14.859 21.59,14.859 ; 21.717,14.732 30.48,14.732 33.401,14.732 ; 23.495,14.732 23.495,23.368 ; 28.575,14.859 28.575,23.368
  lines w1.4: 11.778,8.551 11.778,11.599
  lines w2: 8.89,16.256 8.89,15.748 9.652,14.986 10.414,14.986 11.811,14.986 ; 40.132,14.732 42.545,14.732 43.561,15.748 43.561,16.256
Bottom Solder:
  circle w2.5: c26.025,24.628 r23.5
  rectangle: 10.668,11.089 13.168,13.589
  rectangle: 8.437,19.836 11.629,20.831
  region: 18.382,33.147 18.382,37.147 8.382,37.147 8.382,33.147
  region: 43.782,33.147 43.782,37.147 33.782,37.147 33.782,33.147
  rectangle: 49.744,22.206 51.618,27.277
  rectangle: 0.432,22.098 1.905,27.284
  rectangle: 10.414,37.592 12.414,39.592
  rectangle: 39.497,37.719 41.497,39.719
Mechanical 1:
  lines w0.2: 31.242,32.639 31.242,38.481 ; 36.322,32.639 36.322,38.481
Mechanical 20:
  lines w0.254: 20.118,10.968 22.442,10.968 22.456,10.953 22.456,10.315 22.379,10.238 20.137,10.238 20.129,10.246 20.129,10.953
Mechanical 28:
  circle w0.254: c21.59,14.859 r0.524
  circle w0.254: c30.48,14.732 r0.718
  circle w0.254: c26.025,24.628 r1.257
  lines w0.254: 19.812,13.716 19.812,16.637 20.066,16.637 22.987,16.637 22.987,27.051 29.083,27.051 29.083,16.51 32.385,16.51 32.385,13.716 28.448,13.716 28.194,13.716 28.194,14.097 28.321,14.224 27.051,14.224 27.051,13.716 25.146,13.716 25.146,14.224 23.876,14.224 23.876,13.716 19.812,13.716

## Text inside footprints (layer, text, board x,y; h text height)
C3: Top Overlay "+" at 23.495,36.83 h1.27